# Altium PCB Zavrsni.PcbDoc
Units mm, origin at the board's own origin, x right, y up, seen from the top; angles counter-clockwise.
Board outline 95 x 50 mm, 2 copper layers (Top Layer, Bottom Layer); 19 components, 15 nets, 95 pads, 0 vias.
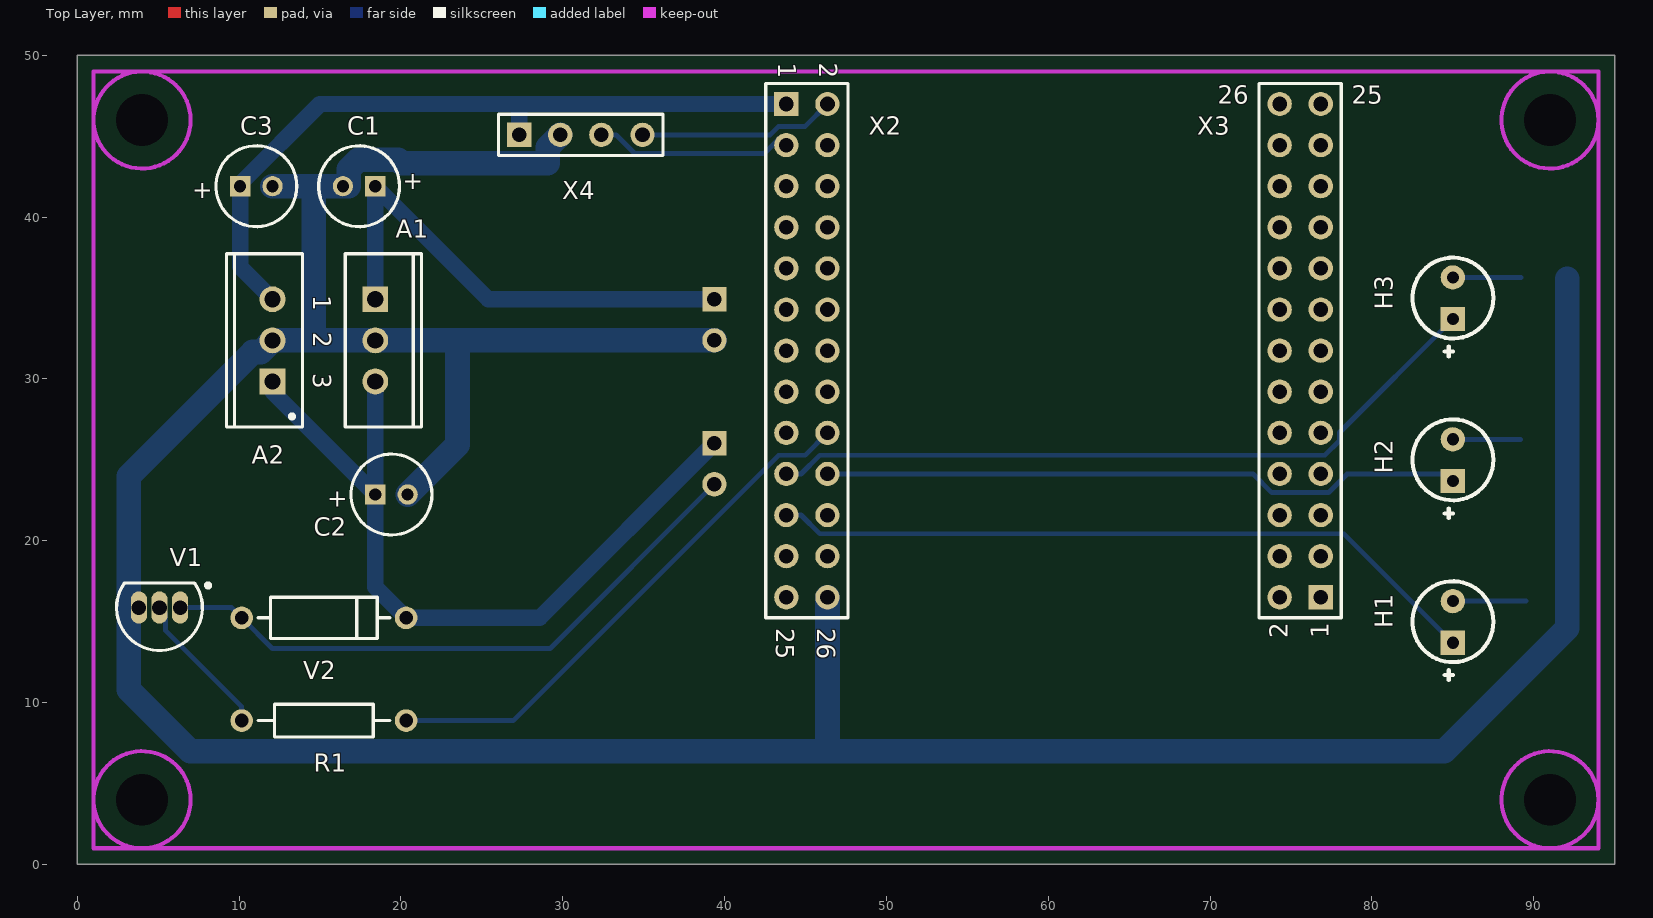
[diagram p0: Top Layer view]
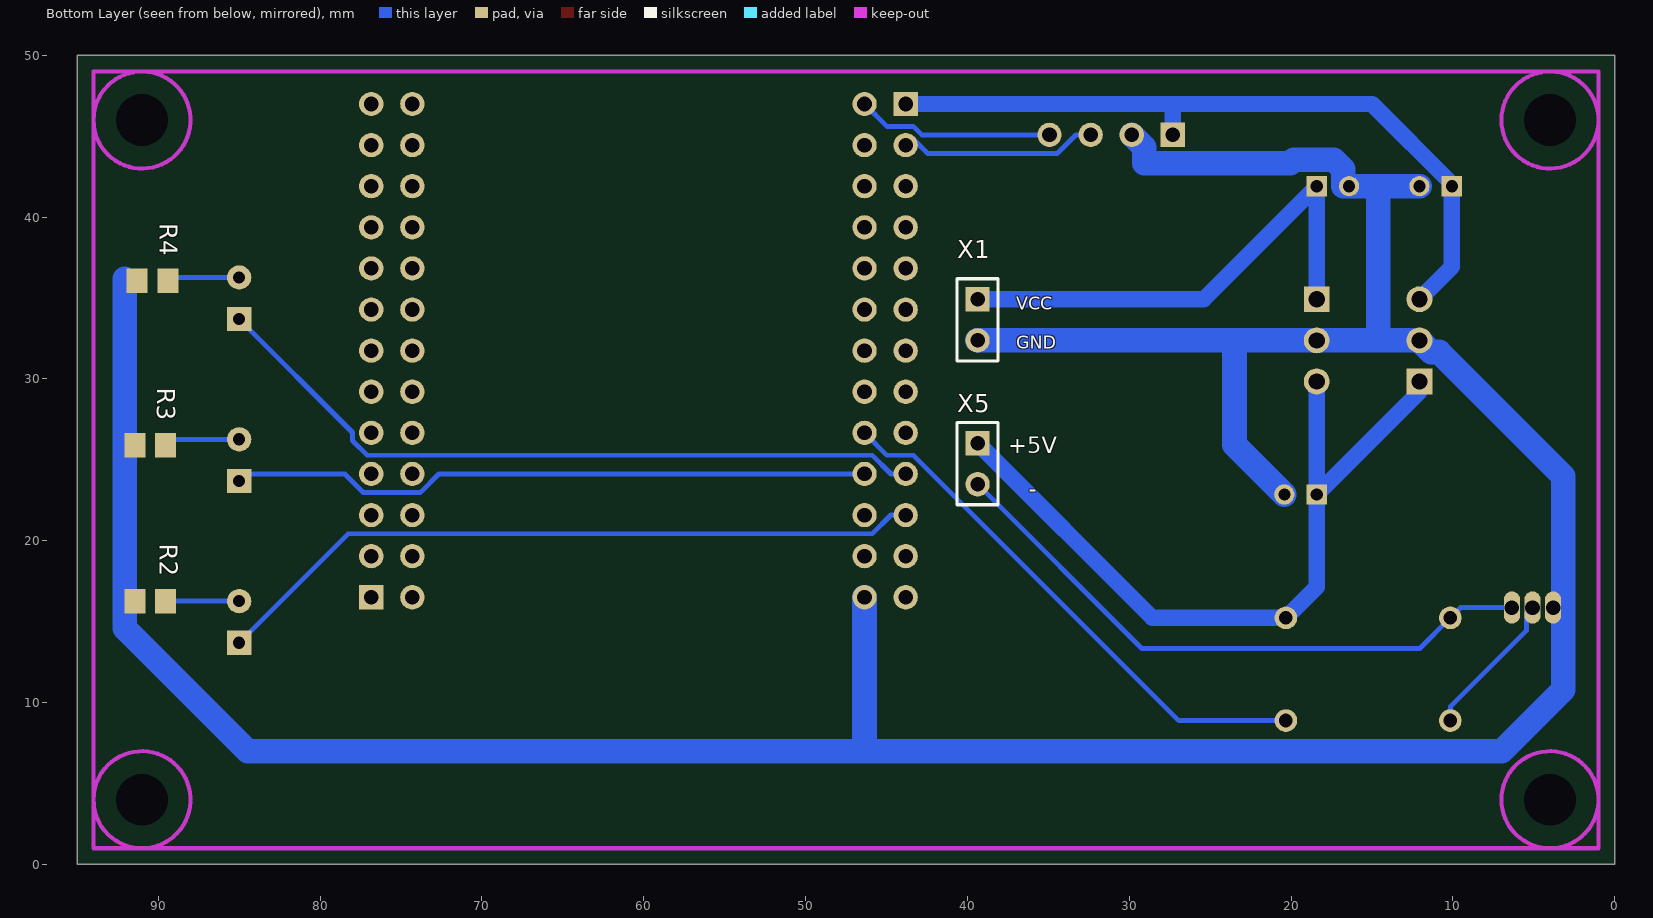
[diagram p1: Bottom Layer view, seen from below]

## Layer stack, top to bottom
Top Solder: solder mask 0.0102, Solder Resist, Dk 3.5
Top Layer: signal copper 0.0356
Dielectric 1: dielectric 0.32, FR-4, Dk 4.8
Bottom Layer: signal copper 0.0356
Bottom Solder: solder mask 0.0102, Solder Resist, Dk 3.5

## Board outline
0,0 95,0 95,50 0,50

## Design rules (kind name [scope] priority, off if disabled: settings)
Clearance [All] p1: gap=0.254
HoleSize [All] p1: absolutevalues=TRUE maxlimit=3.2 minlimit=0.025 maxpercent=80.000 minpercent=20.000
MinimumSolderMaskSliver [All] p1: minsoldermaskwidth=0.051
PolygonConnect [All] p1: connectstyle=Relief reliefconductorwidth=0.254 reliefentries=4 polygonreliefangle="90 Angle" airgapwidth=0.254
RoutingVias [All] p1: holewidth=0.711 width=1.27 viastyle="Through Hole" minholewidth=0.711 minwidth=1.27 maxholewidth=0.711 maxwidth=1.27
SilkToSolderMaskClearance [IsPad] p1: minsilkscreentomaskgap=0.051 clearancetoexposedcopper=TRUE
SolderMaskExpansion [All] p1: expansion=0.102
Width [All] p1: maxlimit=1.524 minlimit=0.305 preferedwidth=0.305
27 further rules are at their usual default settings.

## Components (designator, comment, footprint, x,y, rotation, side; value= is the part's Value field where it differs from the comment)
A1 "µA7805CKC" KC03 18.415,32.385 r270 top
A2 "LM3940IT-3.3" T03B 12.065,32.385 r90 top
C1 "330n/50V" CAPPR2-5x6.8 17.415,41.91 r180 top
C2 "100n/16V" CAPPR2-5x6.8 19.415,22.86 r0 top
C3 "330n/50V" CAPPR2-5x6.8 11.065,41.91 r0 top
H1 "LED1" "LED dioda" 85,15 r90 top
H2 "LED1" "LED dioda" 85,25 r90 top
H3 "LED1" "LED dioda" 85,35 r90 top
R1 "4K7" AXIAL-0.4 15.24,8.89 r180 top
R2 "1K" 2012[0805] 90.49,16.256 r180 bottom
R3 "1K" 2012[0805] 90.49,25.908 r180 bottom
R4 "1K" 2012[0805] 90.358,36.068 r180 bottom
V1 "NPN" TO-226-AA 5.08,15.875 r90 top
V2 "Diode" DIODE-0.4 15.24,15.24 r0 top
X1 "Header 2" HDR1X2 39.37,34.925 r270 bottom
X2 "Header 13X2" HDR2X13 43.815,46.99 r270 top
X3 "Header 13X2" HDR2X13 76.835,16.51 r90 top
X4 "Header 4" HDR1X4 27.305,45.085 r0 top
X5 "Header 2" HDR1X2 39.37,26.035 r270 bottom

## Footprints (in the part's own frame and the unit in brackets; to place one, negate y for a bottom-side part, rotate by r counter-clockwise, add the part's x,y. Pads: shape width x height; smd on the part's side, far side on the other; paste and mask are expansions set on the pad)
2012[0805] [mm] "Chip Resistor; Body 2.0 x 1.3 mm (LxW typ)"
  rect 1.3x1.5 smd: 1(-0.95,0) 2(0.95,0)
AXIAL-0.4 [mm] "Axial Device, Thru-Hole; 2 Leads; 0.4 in Pin Spacing"
  round 1.4 hole 0.85: 1(-5.08,0) 2(5.08,0)
  silkscreen extent -4.06,-1.02 4.06,1.02
CAPPR2-5x6.8 [mm] "Capacitor, Electrolytic, Radial; Body 5 x 6.8 mm (Dia.xH typ); Pin Spacing 2 mm (typ)"
  rect 1.25x1.25 hole 0.75: 1(-1,0)
  round 1.25 hole 0.75: 2(1,0)
  silkscreen extent -2.5,-2.5 2.5,2.5
DIODE-0.4 [mm] "Diode, Thru-Hole; 2 Leads; 0.4 in Pin Spacing"
  round 1.4 hole 0.85: 1(-5.08,0) 2(5.08,0)
  silkscreen extent -4.06,-1.27 4.06,1.27
HDR1X2 [mm] "Connector; Header; 2 Position"
  rect 1.5x1.5 hole 0.9: 1(0,0)
  round 1.5 hole 0.9: 2(2.54,0)
  silkscreen extent -1.27,-1.27 3.81,1.27
HDR1X4 [mm] "Connector; Header; 4 Position"
  rect 1.5x1.5 hole 0.9: 1(0,0)
  round 1.5 hole 0.9: 2(2.54,0) 3(5.08,0) 4(7.62,0)
  silkscreen extent -1.27,-1.27 8.89,1.27
HDR2X13 [mm] "Connector; Header; 13x2 Position"
  rect 1.5x1.5 hole 0.9: 1(0,0)
  round 1.5 hole 0.9: 2(0,2.54) 3(2.54,0) 4(2.54,2.54) 5(5.08,0) 6(5.08,2.54) 7(7.62,0) 8(7.62,2.54) 9(10.16,0) 10(10.16,2.54) 11(12.7,0) 12(12.7,2.54) 13(15.24,0) 14(15.24,2.54) 15(17.78,0) 16(17.78,2.54) 17(20.32,0) 18(20.32,2.54) 19(22.86,0) 20(22.86,2.54) 21(25.4,0) 22(25.4,2.54) 23(27.94,0) 24(27.94,2.54) 25(30.48,0) 26(30.48,2.54)
  silkscreen extent -1.27,-1.27 31.75,3.81
KC03 [mm] "TO, Thru-Hole, Vertical, Heatsink Mounted; 3 In-Line Leads; Pitch 2.54 mm"
  rect 1.6x1.6 hole 1: 1(-2.54,0)
  round 1.6 hole 1: 2(0,0) 3(2.54,0)
  silkscreen extent -5.35,-1.85 5.35,2.85
"LED dioda" [mm]
  rect 1.5x1.5 hole 0.75: 1(-1.3,0)
  round 1.5 hole 0.75: 2(1.27,0)
  silkscreen extent -3.6,-2.5 2.5,2.5
T03B [mm] "TO, Thru-Hole, Vertical, Heatsink Mounted; 3 In-Line Leads; Pitch 2.54 mm"
  rect 1.6x1.6 hole 1: 1(-2.54,0)
  round 1.6 hole 1: 2(0,0) 3(2.54,0)
  silkscreen extent -5.35,-1.85 5.35,2.85, body extent -5.4,-1.9 5.4,2.9, height 19.4
TO-226-AA [mm] "TO, Flat Index; 3 In-Line, Axial Leads; Body Dia. 4.8mm; Leads 0.55 x 0.51 mm (max)"
  oval 2x1 hole 0.9: 1(0,-1.27) 2(0,0) 3(0,1.27)
  silkscreen extent -2.65,-3.13 1.52,2.65, body extent -2.65,-2.66 1.52,2.66, height 5.33

## Part data
A1: "Positive-Voltage Regulator"
A2: "1A Low Dropout Regulator for 5V to 3.3V Conversion, 3-pin TO-220"
C1 C2 C3: library part Elko, "Electrolytic capacitor"
H1 H2 H3: "Typical RED GaAs LED"
R1 R2 R3 R4: library part Res2, "Resistor"
V1: "NPN Bipolar Transistor"
V2: "Default Diode"
X1 X5: "Header, 2-Pin"
X2 X3: "Header, 13-Pin, Dual row"
X4: "Header, 4-Pin"

## Free pads (board coordinates)
  round 3 hole 3.2: 0(4,4) 0(4,46) 0(91,4) 0(91,46)

## Nets (pads, with @x,y where several pads share a name; then routed paths per layer and width w, separated by ;. In a path a pad name is that pad's centre, name@x,y a point inside that pad or via, vN(x,y) a via of type N, cw(c..) or ccw(c..) an arc to the next point about the centre after c; other vN are vias at no path point)
3V3: A2.3 C3.1 X2.1 X4.1 | length 45.7
  Bottom Layer w1.016: A2.3 10.065,36.925 C3.1 10.065,42.065 14.99,46.99 27.305,46.99 ; X4.1 27.305,46.99 ; X2.1 27.305,46.99
5V: A1.3 A2.1 C2.1 V2.2 X5.1 | length 47.9
  Bottom Layer w1.016: A2.1@12.065,29.21 C2.1 ; A1.3 C2.1 ; X5.1 28.575,15.24 V2.2 18.415,17.145 C2.1
GND: A1.2 A2.2 C1.2 C2.2 C3.2 R2.1 R3.1 R4.1 V1.3 X1.2 X2.26 X4.2 | length 218.4
  Bottom Layer w1.524: C3.2 14.605,41.91 ; C2.2 23.495,25.94 23.495,32.385 ; X4.2 29.071,44.311 29.071,43.319 20.056,43.319 19.824,43.551 17.369,43.551 16.774,42.956 16.774,41.91 C1.2 14.605,41.91 ; X1.2 23.495,32.385 ; X2.26 46.355,6.985 ; 92.075,36.195 92.075,14.605 84.455,6.985 46.355,6.985 ; 14.605,32.385 14.605,41.91 ; 14.605,32.385 A1.2 23.495,32.385 ; 14.605,32.385 A2.2 11.341,31.661 10.844,31.661 3.175,23.992 3.175,10.795 6.985,6.985 46.355,6.985
LED_1: H1.1 X2.21 | length 44.5
  Bottom Layer w0.305: X2.21 44.72,21.59 45.876,20.434 78.266,20.434 H1.1
LED_2: H2.1 X2.20 | length 39.8
  Bottom Layer w0.305: X2.20 72.66,24.13 73.816,22.974 77.314,22.974 78.47,24.13 84.57,24.13 H2.1
LED_3: H3.1 X2.19 | length 45.4
  Bottom Layer w0.305: X2.19 44.72,24.13 45.876,25.286 77.087,25.286 77.991,26.191 77.991,26.691 H3.1
NetA1_1: A1.1 C1.1 X1.1 | length 30.8
  Bottom Layer w1.016: A1.1 C1.1 25.4,34.925 X1.1
NetH1_2: H1.2 R2.2 | length 4.5
  Bottom Layer w0.305: H1.2 R2.2@89.526,16.27
NetH2_2: H2.2 R3.2 | length 4.2
  Bottom Layer w0.305: H2.2 R3.2@89.178,26.27
NetH3_2: H3.2 R4.2 | length 4.2
  Bottom Layer w0.305: H3.2 R4.2@89.206,36.27
NetR1_1: R1.1 X2.18 | length 32.8
  Bottom Layer w0.305: R1.1@20.955,8.89 26.94,8.89 43.336,25.286 44.971,25.286 X2.18
NetR1_2: R1.2 V1.2 | length 9.1
  Bottom Layer w0.305: V1.2 5.444,15.511 5.444,14.469 10.16,9.752 R1.2
NetV1_1: V1.1 V2.1 X5.2 | length 38.3
  Bottom Layer w0.305: V1.1 9.525,15.875 V2.1 12.065,13.335 29.21,13.335 X5.2
NetX2_3: X2.3 X4.3 | length 11.9
  Bottom Layer w0.305: X4.3 33.29,45.085 34.446,43.929 42.448,43.929 X2.3@43.392,44.873
TXD: X2.2 X4.4 | length 12.2
  Bottom Layer w0.305: X4.4 42.815,45.085 43.336,45.606 44.971,45.606 X2.2
pads on no net: X2.4 X2.5 X2.6 X2.7 X2.8 X2.9 X2.10 X2.11 X2.12 X2.13 X2.14 X2.15 X2.16 X2.17 X2.22 X2.23 X2.24 X2.25 X3.1 X3.2 X3.3 X3.4 X3.5 X3.6 X3.7 X3.8 X3.9 X3.10 X3.11 X3.12 X3.13 X3.14 X3.15 X3.16 X3.17 X3.18 X3.19 X3.20 X3.21 X3.22 X3.23 X3.24 X3.25 X3.26

## Keep-outs
Keep-Out Layer:
  circle w0.254: c4,46 r3
  circle w0.254: c4,4 r3
  circle w0.254: c91,4 r3
  circle w0.254: c91,46 r3
  lines w0.254: 1,1 1,49 94,49 94,1 1,1

## Silkscreen, mask and mechanical layers (free items; w line width, h text height)
Bottom Overlay:
  text "VCC" at 36.992,34.287 h0.8
  text "GND" at 36.992,31.874 h0.8
  text "+5V" at 37.465,25.4 h1.02
  text "-" at 36.195,23.495 h1.02 r180
Mechanical 1:
  the board outline again, w0.254

## Dimensions
0,0 to 95,0 on Mechanical 2
95,0 to 95,50 on Mechanical 2

## Text inside footprints (layer, text, board x,y; h text height)
A1: Top Overlay "3" at 14.59,30.345 h1.1 r270; Top Overlay "1" at 14.59,35.175 h1.1 r270; Top Overlay "2" at 14.59,32.885 h1.1 r270
C1: Top Overlay "+" at 21.39,42.66 h1.1 r180
C2: Top Overlay "+" at 15.44,22.11 h1.1
C3: Top Overlay "+" at 7.09,41.16 h1.1
X2: Top Overlay "26" at 45.72,14.605 h1.1 r270; Top Overlay "25" at 43.18,14.605 h1.1 r270; Top Overlay "1" at 43.307,49.53 h1.1 r270; Top Overlay "2" at 45.847,49.53 h1.1 r270
X3: Top Overlay "26" at 70.485,46.99 h1.1; Top Overlay "25" at 78.74,46.99 h1.1; Top Overlay "1" at 77.343,13.97 h1.1 r90; Top Overlay "2" at 74.803,13.97 h1.1 r90